# EAGLE board RFBoardLayoutGen0_v02.4 (EAGLE 7.5.0)
AUTHOR: Kirchschlager Raimund
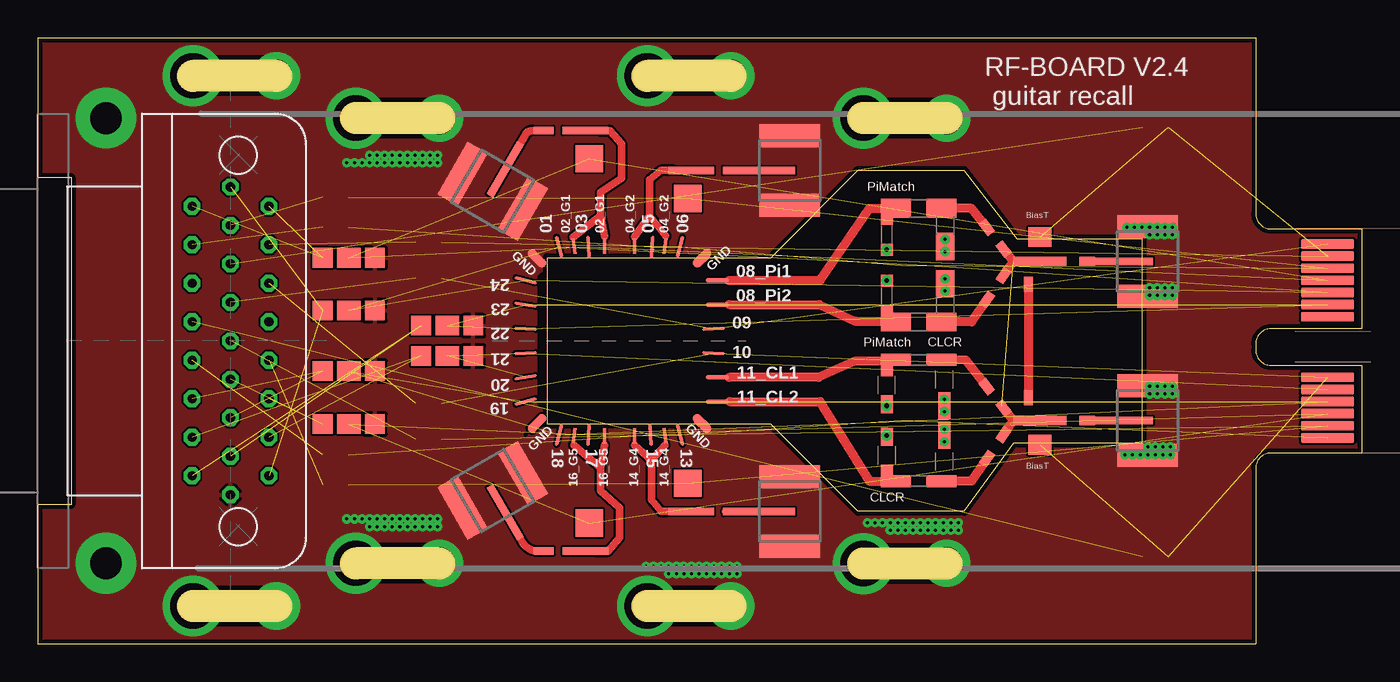
[diagram p0: board, top side]
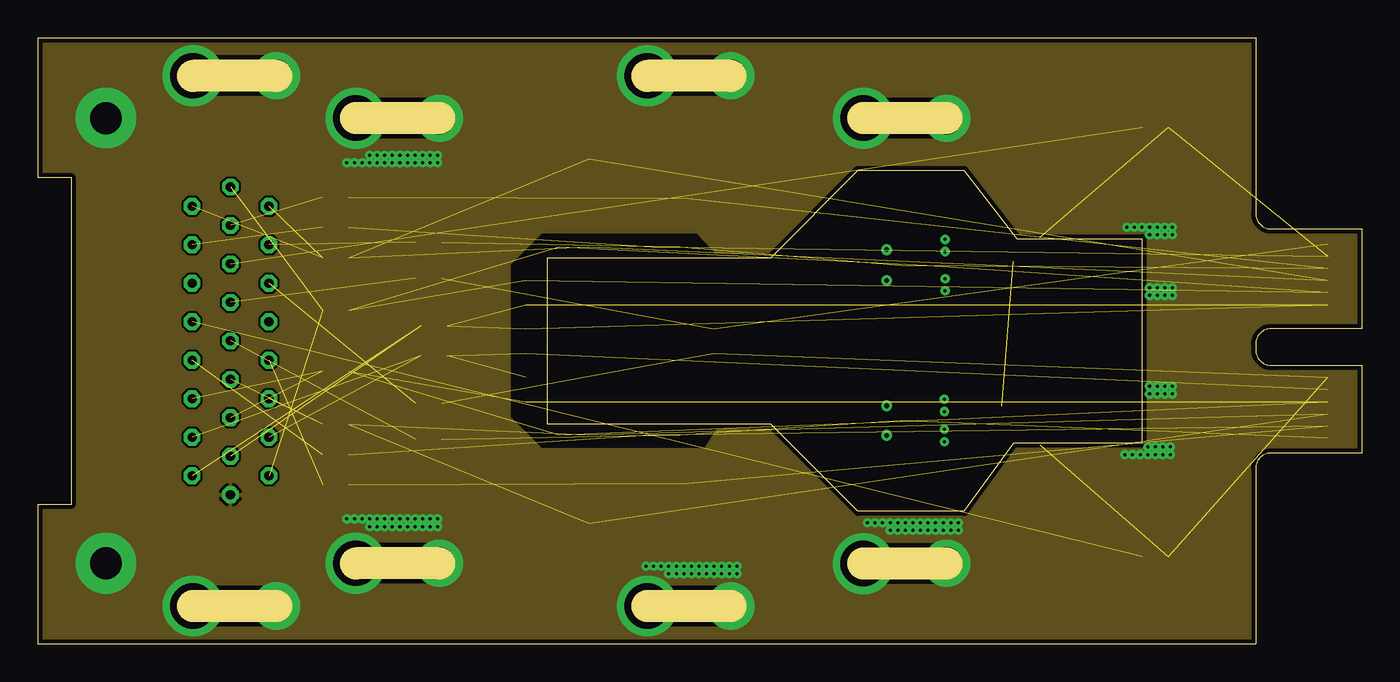
[diagram p1: board, inner layer Route2]
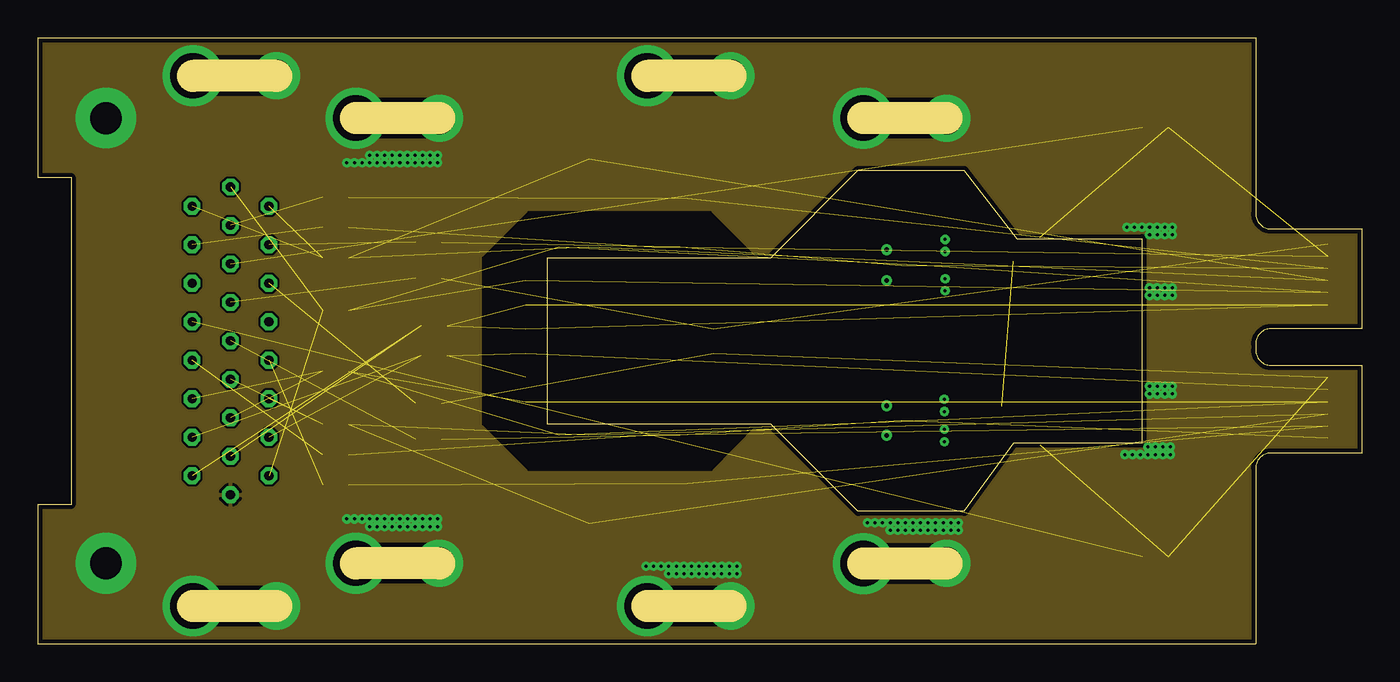
[diagram p2: board, inner layer Route15]
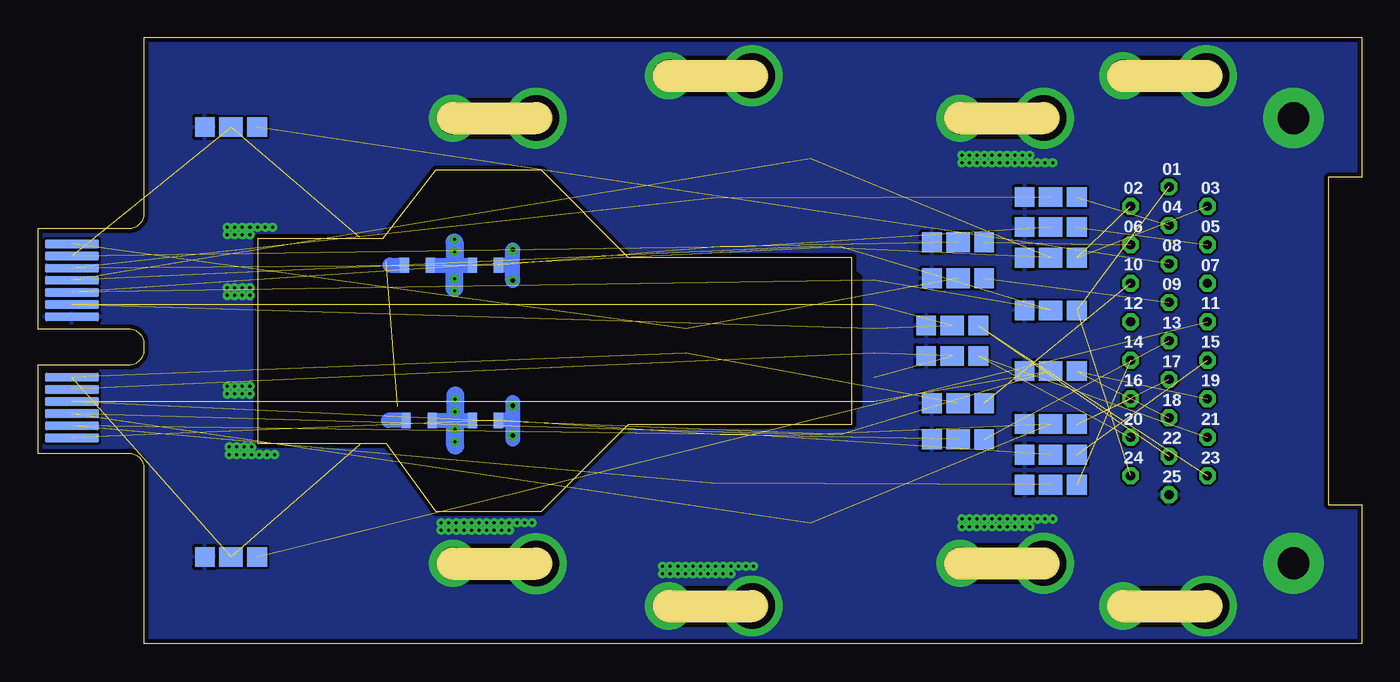
[diagram p3: board, bottom side, seen from below]

Size 87.4 x 40 mm. Coordinates in mm from the lower left corner, seen from the top.
Outline: 26.5,5.3 21,5.3
Outline: 26.5,34.7 21,34.7
Outline: 26.5,5.32 21,5.32
Outline: 15.75,37.5 10.25,37.5
Outline: 15.75,2.5 10.25,2.5
Outline: 45.75,2.5 40.25,2.5
Outline: 45.75,37.5 40.25,37.5
Outline: 60,34.7 54.5,34.7
Outline: 60,5.3 54.5,5.3
Outline: 0,40 0,30.8 2.2,30.8 2.2,9.2 0,9.2 0,0 80.4,0 80.4,11.6 arc-90 81.4,12.6 87.4,12.6 87.4,18.4 81.4,18.4 arc-90 80.4,19.4 80.4,19.8 arc-90 81.4,20.8 87.4,20.8 87.4,27.4 81.4,27.4 arc-90 80.4,28.4 80.4,40 0,40
Outline: 33.65,25.5 48.4,25.5 54.15,31.25 61.15,31.25 64.65,26.75 72.9,26.75 72.9,13.25 64.4,13.25 61.15,8.75 54.15,8.75 48.4,14.5 33.65,14.5 33.65,25.5
Copper layers (1+2*15+16): Top 0.035mm / dielectric 0.38mm / Route2 0.035mm / dielectric 0.71mm / Route15 0.035mm / dielectric 0.38mm / Bottom 0.035mm
Design rules "PCB-POOL HighSpec_ML4+ *": minimum track width 0.125mm, minimum drill 0.2mm, track to track 0.125mm, track to pad 0.125mm, pad to pad 0.125mm, via to via 0.125mm, smd to smd 0.125mm, copper to edge 0.3mm, drill to drill 0.2mm, minimum pad ring 10mil, minimum via ring 8mil, stop-mask expansion 0.075mm, vias tented up to drill 0.2mm, thermal gap 0.2mm
Net classes: 0 GND: clearance 0.15 mm; 1 RF: clearance 1 mm

## Footprints (pad centres in the part's own frame; a part is rotated, then mirrored left to right if it is on the bottom)
BIAS_TEE_DOWN_0603 = smd 1.3 x 0.5: HF 3.25,0 | smd 1.8 x 1.8: LF 0.25,1.85 | smd 3 x 0.5: OUT 0.5,0
BIAS_TEE_UP_0603 = smd 1.3 x 0.5: HF 3.25,0 | smd 1.8 x 1.8: LF 0.25,-1.85 | smd 3 x 0.5: OUT 0.5,0
24DC+4RF/400MU-PADS/10.0X10.0_V1.5 = smd 0 x 0: BASE 0,0 | smd 1.5 x 0.6 rotated 315: P$1 -5.45,5.45; P$6 5.45,-5.45 | smd 1.5 x 0.6 rotated 45: P$3 5.45,5.45; P$7 -5.45,-5.45 | smd 1.5 x 0.2 rotated 93: P$4 2.05,-6.2; P$40 -2.05,6.2 | smd 0 x 0 rotated 45: P$5 -6.2,-6.2 | smd 1.5 x 0.2 rotated 345: P$26 -6.2,4 | smd 1.5 x 0.2 rotated 351: P$27 -6.2,2.4 | smd 1.5 x 0.2 rotated 357: P$28 -6.2,0.8; P$35 6.2,-0.8 | smd 1.5 x 0.2 rotated 3: P$29 -6.2,-0.8; P$34 6.2,0.8 | smd 1.5 x 0.2 rotated 9: P$30 -6.2,-2.4 | smd 1.5 x 0.2 rotated 15: P$31 -6.2,-4 | smd 1.5 x 0.3: P$32 6.45,4; P$33 6.45,2.4; P$36 6.45,-2.4; P$37 6.45,-4 | smd 1.5 x 0.2 rotated 105: P$38 -4,6.2; P$49 4,-6.2 | smd 1.5 x 0.2 rotated 87: P$42 2.15,6.2; P$45 -2.05,-6.2 | smd 1.5 x 0.2 rotated 75: P$43 4,6.2; P$44 -4,-6.2 | smd 1 x 0.2 rotated 97: RF$02_G11 -3,6.25; RF$14_G41 3,-6.25 | smd 0.2 x 1: RF$02_G12 -1,6.25; RF$04_G21 1,6.25; RF$14_G42 1,-6.25; RF$16_G51 -1,-6.25 | smd 1 x 0.2 rotated 83: RF$04_G22 3,6.25; RF$16_G52 -3,-6.25
25_SOCKET_M83513/13-D = drill 0.6 octagon: 01 10.16,0; 02 8.89,2.54; 03 6.35,2.54; 04 3.81,2.54; 05 2.54,0; 06 1.27,2.54; 07 0,0; 08 -1.27,2.54; 09 -2.54,0; 10 -3.81,2.54; 11 -6.35,2.54; 12 -8.89,2.54; 13 -10.16,0; 14 8.89,-2.54; 15 7.62,0; 16 6.35,-2.54; 17 5.08,0; 18 3.81,-2.54; 19 1.27,-2.54; 20 -1.27,-2.54; 21 -3.81,-2.54; 22 -5.08,0; 23 -6.35,-2.54; 24 -7.62,0; 25 -8.89,-2.54
MEC8-113-02-L-D-RA1 = smd 0.6 x 3.5: 1 6.4,0.15; 3 5.6,0.15; 5 4.8,0.15; 7 4,0.15; 9 3.2,0.15; 11 2.4,0.15; 13 -1.6,0.15; 15 -2.4,0.15; 17 -3.2,0.15; 19 -4,0.15; 21 -4.8,0.15; 23 -5.6,0.15; 25 -6.4,0.15 | smd 0.6 x 3.5 bottom: 2 6.4,0.15; 4 5.6,0.15; 6 4.8,0.15; 8 4,0.15; 10 3.2,0.15; 12 2.4,0.15; 14 -1.6,0.15; 16 -2.4,0.15; 18 -3.2,0.15; 20 -4,0.15; 22 -4.8,0.15; 24 -5.6,0.15; 26 -6.4,0.15
LP-FILTER/1_STAGE/OS/0603_TOP_V1_01 = smd 1.3 x 1.3: $1 -1.6,0.01; GND@1 1.85,0.01 | smd 1.55 x 1.3: $2 0.125,0.01
PI_MATCH_V01_UP = smd 2 x 1.25: $1 0,0; $3 3,0 | smd 0.8 x 1.4: $2 -0.6,0.375 | smd 1.2 x 1.8: $4 3.25,2.525 | smd 0.8 x 0.8: GND@1 -0.6,2.725
CLCR_V01_DOWN = smd 2 x 0.8: $1 0,0; $3 3,0 | smd 0.8 x 1.4: $2 -0.6,-0.375 | smd 0.8 x 1.2: GND@1 -0.6,-2.925 | smd 0.8 x 1.8: GND@2 3.2,-3.025
LP-FILTER/1_STAGE/OS/0603_BOTTOM_V1_01 = smd 1.3 x 1.3 bottom: $1 -1.6,0.01; GND@1 1.85,0.01 | smd 1.55 x 1.3 bottom: $2 0.125,0.01
SMP_STRAIGHT_MINI_WIDE_V1_01 = smd 0.5 x 4: 1 0,1.653 | smd 1.524 x 4: GND -2.292,0; GND@1 2.292,0
BIAS_TEE_UP_V01 = smd 1.5 x 1.3: P$1 0,-0.95 | smd 3.5 x 0.6: P$2 0,0.65
BIAS_TEE_DOWN_V01 = smd 1.5 x 1.3: P$1 0,0.95 | smd 3.5 x 0.6: P$2 0,-0.65
SMD1-0,6 = smd 1 x 0.6: 1 0,0
PI_MATCH_V01_DOWN = smd 2 x 1.25: $1 0,0; $3 3,0 | smd 0.8 x 1.4: $2 -0.6,-0.375 | smd 1.2 x 1.8: $4 3.25,-2.525 | smd 0.8 x 0.8: GND@1 -0.6,-2.725
CLCR_V01_UP = smd 2 x 0.8: $1 0,0; $3 3,0 | smd 0.8 x 1.4: $2 -0.6,0.375 | smd 0.8 x 1.2: GND@1 -0.6,2.925 | smd 0.8 x 1.8: GND@2 3.2,3.025
SMP_STRAIGHT_MINI_WIDE = smd 0.5 x 4: 1 0,1.653 | smd 1.524 x 4: 2@1 -2.292,0; 2@2 2.292,0

## Placement (x,y rotation side)
B$1  [BIAS_TEE_DOWN_0603]  36.65,33.88 180 top
B$2  [BIAS_TEE_UP_0603]  42.65,31.25 0 top
B$4  [BIAS_TEE_DOWN_0603]  42.65,8.75 0 top
B$5  [BIAS_TEE_UP_0603]  36.65,6.12 180 top
E$1  [24DC+4RF/400MU-PADS/10.0X10.0_V1.5]  38.4,20 0 top
E$2  [25_SOCKET_M83513/13-D]  12.71,20 90 top
E$3  [MEC8-113-02-L-D-RA1]  85,20 270 top
E$4  [LP-FILTER/1_STAGE/OS/0603_TOP_V1_01]  20.4,29.5 180 bottom
E$5  [LP-FILTER/1_STAGE/OS/0603_TOP_V1_01]  20.4,12.5 180 bottom
E$6  [LP-FILTER/1_STAGE/OS/0603_TOP_V1_01]  20.4,25.5 180 bottom
E$7  [LP-FILTER/1_STAGE/OS/0603_TOP_V1_01]  20.4,18 0 top
E$8  [LP-FILTER/1_STAGE/OS/0603_TOP_V1_01]  20.4,22 0 top
E$9  [PI_MATCH_V01_UP]  56.65,21.25 0 top
E$10  [CLCR_V01_DOWN]  56.65,18.75 0 top
E$11  [LP-FILTER/1_STAGE/OS/0603_TOP_V1_01]  26.9,21 0 top
E$12  [LP-FILTER/1_STAGE/OS/0603_TOP_V1_01]  20.4,14.5 0 top
E$13  [LP-FILTER/1_STAGE/OS/0603_TOP_V1_01]  74.53,5.75 180 bottom
E$14  [LP-FILTER/1_STAGE/OS/0603_TOP_V1_01]  74.53,34.12 180 bottom
E$15  [LP-FILTER/1_STAGE/OS/0603_TOP_V1_01]  26.9,19 0 top
E$16  [LP-FILTER/1_STAGE/OS/0603_BOTTOM_V1_01]  20.4,22 0 top
E$17  [LP-FILTER/1_STAGE/OS/0603_BOTTOM_V1_01]  20.4,14.5 0 top
E$18  [LP-FILTER/1_STAGE/OS/0603_BOTTOM_V1_01]  20.4,10.5 0 top
E$19  [LP-FILTER/1_STAGE/OS/0603_BOTTOM_V1_01]  26.9,21 0 top
E$20  [LP-FILTER/1_STAGE/OS/0603_BOTTOM_V1_01]  20.4,27.5 0 top
E$21  [LP-FILTER/1_STAGE/OS/0603_BOTTOM_V1_01]  20.4,18 0 top
E$22  [LP-FILTER/1_STAGE/OS/0603_BOTTOM_V1_01]  26.9,19 0 top
E$23  [LP-FILTER/1_STAGE/OS/0603_BOTTOM_V1_01]  20.4,25.5 180 bottom
E$24  [LP-FILTER/1_STAGE/OS/0603_BOTTOM_V1_01]  26.52,26.5 0 top
E$25  [LP-FILTER/1_STAGE/OS/0603_BOTTOM_V1_01]  26.52,24.12 0 top
E$26  [SMP_STRAIGHT_MINI_WIDE_V1_01]  73.28,25.25 90 top
E$27  [LP-FILTER/1_STAGE/OS/0603_BOTTOM_V1_01]  26.52,13.5 0 top
E$28  [LP-FILTER/1_STAGE/OS/0603_BOTTOM_V1_01]  26.52,15.88 0 top
E$29  [BIAS_TEE_UP_V01]  66.15,14.1 0 top
E$30  [BIAS_TEE_DOWN_V01]  66.15,25.9 0 top
E$31  [SMD1-0,6]  65.4,23.75 90 top
E$32  [PI_MATCH_V01_DOWN]  56.65,28.75 0 top
E$33  [SMP_STRAIGHT_MINI_WIDE_V1_01]  73.28,14.75 90 top
E$34  [SMD1-0,6]  57,25 90 bottom
E$35  [SMD1-0,6]  65.4,16.25 90 top
E$36  [SMD1-0,6]  58.7,25 90 bottom
E$37  [CLCR_V01_UP]  56.65,10.75 0 top
E$38  [SMD1-0,6]  62.65,27.48 128 top
E$39  [SMD1-0,6]  63.75,26.07 128 top
E$40  [SMD1-0,6]  62.65,16.98 128 top
E$41  [SMD1-0,6]  63.75,15.57 128 top
E$42  [SMD1-0,6]  63.75,24.3 235.5 top
E$43  [SMD1-0,6]  62.67,22.74 235.5 top
E$44  [SMD1-0,6]  63.75,13.8 235.5 top
E$45  [SMD1-0,6]  62.67,12.24 235.5 top
E$46  [SMD1-0,6]  57,14.75 90 bottom
E$47  [SMD1-0,6]  58.7,14.75 90 bottom
E$48  [SMD1-0,6]  69.28,14.75 0 top
E$49  [SMD1-0,6]  61.5,25 90 bottom
E$50  [SMD1-0,6]  63.2,25 90 bottom
E$51  [SMD1-0,6]  61.38,14.75 90 bottom
E$52  [SMD1-0,6]  63.08,14.75 90 bottom
E$54  [SMD1-0,6]  69.28,25.25 0 top
S$2  MC-921SMALL  [SMP_STRAIGHT_MINI_WIDE]  30.02,10.12 210 top
S$3  MC-921SMALL  [SMP_STRAIGHT_MINI_WIDE]  49.65,8.75 90 top
S$6  MC-921SMALL  [SMP_STRAIGHT_MINI_WIDE]  49.65,31.25 90 top
S$7  MC-921SMALL  [SMP_STRAIGHT_MINI_WIDE]  30.02,29.88 330 top

## Library data of the parts
B$1 B$2 B$4 B$5 E$29 E$30 = Bias tee
E$1 = SampleArea
E$2 = Glenair
E$3 = MEC8-130-02-X-D-RA1
E$4-E$8 E$11-E$25 E$27 E$28 = LPFilter
E$9 E$10 E$32 E$37 = MatchCircuit
E$26 E$33 S$2 S$3 S$6 S$7 = RF Connectors
E$31 E$34-E$36 E$38-E$52 E$54 = PADS

## Nets
D$2: B$1.LF E$3.19 E$6.$2
D$4: B$2.LF E$3.21 E$4.$2
GND: E$1.P$1 E$1.P$3 E$1.P$6 E$2.13 E$3.14 E$4.GND@1 E$5.GND@1 E$6.GND@1 E$7.GND@1 E$8.GND@1 E$11.GND@1 E$12.GND@1 E$13.GND@1 E$14.GND@1 E$15.GND@1 E$16.GND@1 E$17.GND@1 E$18.GND@1 E$19.GND@1 E$20.GND@1 E$21.GND@1 E$22.GND@1 E$23.GND@1 E$24.GND@1 E$25.GND@1 E$26.GND E$26.GND@1 E$27.GND@1 E$28.GND@1 E$33.GND E$33.GND@1 S$2.2@1 S$2.2@2 S$3.2@1 S$3.2@2 S$6.2@1 S$6.2@2 S$7.2@1 S$7.2@2
S$1: E$1.P$30 E$22.$2
S$2: E$1.P$44 E$3.8 E$21.$2 E$47.1
S$55: E$1.P$49 E$3.2 E$27.$2 E$46.1
S$67: E$2.24 E$11.$1
S$68: E$1.P$29 E$3.9 E$15.$2
S$76: E$2.11 E$15.$1
S$79: E$1.P$27 E$3.16 E$19.$2
S$80: E$2.12 E$19.$1
S$81: E$3.10
S$83: E$2.23 E$22.$1
S$84: E$1.P$26 E$3.17 E$8.$2
S$85: E$2.25 E$8.$1
S$86: E$1.P$38 E$3.18 E$16.$2 E$36.1
S$88: E$2.01 E$16.$1
S$89: E$1.P$31 E$3.7 E$7.$2
S$90: E$2.10 E$7.$1
S$95: E$2.22 E$21.$1
S$144: E$2.14 E$6.$1
S$145: E$1.P$40 E$3.20 E$23.$2
S$146: E$2.02 E$23.$1
S$147: B$5.LF E$3.6 E$17.$2
S$149: E$2.15 E$4.$1
S$150: E$1.P$42 E$3.24 E$20.$2
S$151: E$2.03 E$20.$1
S$152: E$1.P$45 E$3.5 E$12.$2
S$154: E$2.09 E$12.$1
S$155: B$4.LF E$3.4 E$18.$2
S$156: E$2.21 E$17.$1
S$157: E$1.P$4 E$3.3 E$5.$2
S$158: E$2.08 E$5.$1
S$160: E$2.20 E$18.$1
S$162: E$2.16 E$24.$1
S$168: E$2.17 E$14.$1
S$169: E$1.P$34 E$3.26 E$25.$2
S$170: E$2.05 E$25.$1
S$171: E$2.07 E$27.$1
S$174: E$1.P$28 E$3.15 E$11.$2
S$175: E$2.06 E$13.$1
S$177: E$1.P$35 E$3.11 E$28.$2
S$178: E$2.18 E$28.$1
S$183: E$3.12 E$13.$2 E$29.P$1
S$190: E$3.23 E$14.$2 E$30.P$1
S$199: E$30.P$2
S$211: E$1.P$43 E$3.22 E$24.$2 E$34.1

## Tracks (layer width: path | path; a pad name or v marks a point on that pad's centre or on a via)
D$2  (2 unrouted)
D$4  (2 unrouted)
GND  (via drill 0.2, 2.1, 2.1 pad 4, 3, 3 pad 0.25)
  other vias: 40.25,37.5 45.75,37.5 4.5,34.7 21,34.7 26.5,34.7 10.25,37.5 15.75,37.5 54.5,5.3 40.25,2.5 45.75,2.5 60,5.32 54.5,34.7 60,34.7 4.5,5.32 21,5.32 26.5,5.32 10.25,2.5 15.75,2.5 20.4,31.75 20.9,31.75 21.4,31.75 21.9,31.75 22.4,31.75 22.9,31.75 23.4,31.75 23.9,31.75 24.4,31.75 24.9,31.75 25.4,31.75 25.9,31.75 26.4,31.75 26.4,32.25 25.9,32.25 25.4,32.25 24.9,32.25 24.4,32.25 23.9,32.25 23.4,32.25 22.9,32.25 22.4,32.25 21.9,32.25 26.4,8.25 25.9,8.25 25.4,8.25 24.9,8.25 24.4,8.25 23.9,8.25 23.4,8.25 22.9,8.25 22.4,8.25 21.9,8.25 21.4,8.25 20.9,8.25 20.4,8.25 21.9,7.75 22.4,7.75 22.9,7.75 23.4,7.75 23.9,7.75 24.4,7.75 24.9,7.75 25.4,7.75 25.9,7.75 26.4,7.75 46.15,5.12 45.65,5.12 45.15,5.12 44.65,5.12 44.15,5.12 43.65,5.12 43.15,5.12 42.65,5.12 42.15,5.12 41.65,5.12 41.15,5.12 40.65,5.12 40.15,5.12 41.65,4.62 42.15,4.62 42.65,4.62 43.15,4.62 43.65,4.62 44.15,4.62 44.65,4.62 45.15,4.62 45.65,4.62 46.15,4.62 60.77,8 60.27,8 59.77,8 59.27,8 58.77,8 58.27,8 57.77,8 57.27,8 56.77,8 56.27,8 55.77,8 55.27,8 54.77,8 56.27,7.5 56.77,7.5 57.27,7.5 57.77,7.5 58.27,7.5 58.77,7.5 59.27,7.5 59.77,7.5 60.27,7.5 60.77,7.5 74.78,13 74.28,13 73.78,13 73.28,13 74.9,16.5 74.4,16.5 73.9,16.5 73.4,16.5 74.9,17 74.4,17 73.9,17 73.4,17 74.9,23.5 74.4,23.5 73.9,23.5 73.4,23.5 74.9,27 74.4,27 73.9,27 73.4,27 74.9,27.5 74.4,27.5 73.9,27.5 73.4,27.5 72.9,27.5 72.4,27.5 71.9,27.5 74.9,23 74.4,23 73.9,23 73.4,23 74.78,12.5 74.28,12.5 73.78,12.5 73.28,12.5 72.78,12.5 72.28,12.5 71.78,12.5
  pour Top (rank 6): -4.85,43.6 92.1,43.7 92.1,-4.7 -4.85,-4.8
  pour Route2 (rank 6): -7.5,45.1 92.6,45.6 92.6,-5.15 -7.5,-5.65
  pour Route15 (rank 6): -11.25,48.5 94.9,48.5 94.9,-11.4 -11.25,-11.4
  pour Bottom (rank 6): -16.65,53.3 97.15,53.2 97.15,-15.85 -16.65,-15.75
N$3
  Top 0.5: 37.02,33.88 37.77,33.88 38.52,33 38.52,30.75 37.15,29.8 37.15,28.38
S$1  (1 unrouted)
S$2  (3 unrouted)
S$12  (via drill 0.2)
  other vias: 59.9,25.89
S$17
  cutout Route15: 44.46,11.51 42.9,11.5 32.4,11.5 29.4,14.5 29.4,19.5 29.4,20.5 29.4,25.5 32.4,28.5 44.4,28.5 47.4,25.5 47.4,20.5 47.4,19.5 47.4,14.5
S$55  (3 unrouted)
S$67  (1 unrouted)
S$68  (2 unrouted)
S$76  (1 unrouted)
S$79  (2 unrouted)
S$80  (1 unrouted)
S$82
  cutout Route15: 43.96,13.01 33.3,13.01 31.3,14.99 31.3,25.02 33.3,27 43.5,27 45.43,24.94 45.43,15.29
  cutout Bottom: 42.46,14.76 34.55,14.76 33.05,15.74 33.05,24.27 34.3,25.25 42.5,25.25 43.89,25.24 43.89,14.75
  cutout Top: 42.46,14.76 34.55,14.76 33.05,15.74 33.05,24.27 34.3,25.25 42.5,25.25 43.89,25.24 43.89,14.75
S$83  (1 unrouted)
S$84  (2 unrouted)
S$85  (1 unrouted)
S$86  (3 unrouted)
S$88  (1 unrouted)
S$89  (2 unrouted)
S$90  (1 unrouted)
S$91
  Top 0.5: 45.65,31.25 49.65,31.25
S$95  (1 unrouted)
S$144  (1 unrouted)
S$145  (2 unrouted)
S$146  (1 unrouted)
S$147  (2 unrouted)
S$149  (1 unrouted)
S$150  (2 unrouted)
S$151  (1 unrouted)
S$152  (2 unrouted)
S$154  (1 unrouted)
S$155  (2 unrouted)
S$156  (1 unrouted)
S$157  (2 unrouted)
S$158  (1 unrouted)
S$159
  Top 0.5: 33.52,33.88 32.77,33.88
S$160  (1 unrouted)
S$161
  Bottom 1.2: 59.9,23.5 59.9,24.9
S$162  (1 unrouted)
S$163  (via drill 0.2)
  other vias: 59.85,15.34
S$164
  Bottom 1.2: 59.85,16.4 59.85,14.98
S$165
  cutout Route2: 43.96,13.01 33.3,13.01 31.3,14.99 31.3,25.02 33.3,27 43.5,27 45.43,24.94 45.43,15.29
S$166  (via drill 0.2)
  other vias: 59.9,24.11
S$167
  Bottom 1: 56.05,24 56.05,26
S$168  (1 unrouted)
S$169  (2 unrouted)
S$170  (1 unrouted)
S$171  (1 unrouted)
S$172
  Bottom 1: 56.1,25 56.8,25
S$173
  Bottom 1: 61.25,25 58.9,25
S$174  (2 unrouted)
S$175  (1 unrouted)
S$176
  Top 0.6: 45.65,24 51.65,24 54.9,28.75 56.4,28.75
S$177  (2 unrouted)
S$178  (1 unrouted)
S$180
  Top 0.6: 45.65,22.4 51.6,22.4 53.95,21.3 56.6,21.3
S$181
  cutout Top: 43.9,25.5 48.4,25.5 54.1,31.2 61.2,31.2 64.6,26.8 72.9,26.8 72.9,13.3 64.4,13.3 61.2,8.8 54.2,8.8 54.1,8.8 48.4,14.5 43.9,14.5
  cutout Route2: 43.9,25.5 48.4,25.5 54.1,31.2 61.2,31.2 64.6,26.8 72.9,26.8 72.9,13.3 64.4,13.3 61.2,8.8 54.2,8.8 54.1,8.8 48.4,14.5 43.9,14.5
  cutout Route15: 43.9,25.5 48.4,25.5 54.1,31.2 61.2,31.2 64.6,26.8 72.9,26.8 72.9,13.3 64.4,13.3 61.2,8.8 54.2,8.8 54.1,8.8 48.4,14.5 43.9,14.5
  cutout Bottom: 43.9,25.5 48.4,25.5 54.1,31.2 61.2,31.2 64.6,26.8 72.9,26.8 72.9,13.3 64.4,13.3 61.2,8.8 54.2,8.8 54.1,8.8 48.4,14.5 43.9,14.5
S$183  (2 unrouted)
S$184
  Top 0.5: 32.65,33.88 arc58 32.22,33.66 31.4,32.25
S$185
  Top 0.5: 35.35,26.85 37.15,28.25 37.4,26.9
S$186
  Top 0.5: 40.4,28.25 40.4,30.62 41.15,31.25 41.9,31.25 42.02,31.25 44.4,31.25 | 40.4,28.25 39.4,26.88 | 40.4,28.25 41.45,26.93
S$187
  Top 0.6: 51.65,16 54.9,10.75 56.9,10.75
S$188
  Top 0.6: 56.65,18.65 53.9,18.65 51.55,17.6 45.65,17.6
S$189
  Top 0.6: 66.65,14.75 64.4,14.75
S$190  (2 unrouted)
S$191  (via drill 0.3)
  other vias: 56.05,26.02
S$192
  Bottom 1: 63.27,14.75 64.28,14.75
S$193
  Bottom 1: 56.05,15.95 56.05,13.53
S$194
  Bottom 1.2: 59.9,26.5 59.9,25.2
S$195
  Top 0.6: 65.4,23.75 65.4,16.25
S$196  (via drill 0.3)
  other vias: 56.05,15.72
S$197
  Top 0.6: 59.4,28.75 61.65,28.75 62.75,27.35
S$198
  Top 0.6: 59.65,21.25 61.65,21.25 62.75,22.85
S$200
  Top 0.6: 59.4,18.75 61.27,18.74 62.75,16.85
S$201  (1 unrouted)
  Top 0.6: 65.9,14.75 64.4,14.75 63.65,15.7 | 64.4,25.25 63.65,26.2
S$202
  Top 0.6: 63.68,24.2 64.4,25.25
S$203
  Top 0.6: 61.65,10.75 59.65,10.75
S$204
  Top 0.6: 61.65,10.75 62.75,12.35
S$205
  Top 0.6: 63.68,13.7 64.4,14.75
S$206
  Top 0.6: 45.67,16 51.65,16
S$207
  Bottom 1: 61.12,14.75 58.9,14.75
S$208  (via drill 0.2)
  other vias: 59.9,26.7
S$209
  Bottom 1.2: 59.85,13.1 59.85,14.6
S$210  (via drill 0.3)
  other vias: 56.05,24
S$211  (3 unrouted)
S$212  (via drill 0.2)
  other vias: 59.9,23.31
S$213  (via drill 0.3)
  other vias: 56.05,13.77
S$214  (via drill 0.2)
  other vias: 59.85,13.34
S$215  (via drill 0.2)
  other vias: 59.84,16.14
S$216  (via drill 0.2)
  other vias: 59.85,14.17
S$217
  Top 0.5: 45.4,8.75 49.65,8.75
S$218
  Bottom 1: 56.1,14.75 56.8,14.75
S$219
  Top 0.5: 40.52,12.12 40.52,9.5 41.15,8.75 41.9,8.75 42.65,8.75 44.4,8.75 | 40.52,12.12 41.4,13.12 | 40.52,12.12 39.4,13.12
S$220
  Bottom 1: 64.15,25 63.52,25
S$221
  Top 0.5: 33.02,6.12 arc-61 31.98,6.73 31.45,7.68
S$222
  Top 0.5: 37.15,11.62 37.15,10.12 38.4,9 38.4,7 37.65,6.12 37.52,6.12 36.77,6.12 34.9,6.12 | 37.15,11.62 37.4,13.12 | 37.15,11.62 35.4,13.12
S$223
  Top 0.5: 30.02,10.12 31.72,7.18
S$224
  Top 0.5: 31.77,32.88 29.97,29.77

## Text on the board
tPlace: 4 | 2 | 22 | 24 | 19 | 21 | 17 | 8 | 15 | RF-BOARD V2.4 / guitar recall | 11
bPlace: 5 | 3 | 23 | VB2_Pi / 1 | 20 | 18 / VB2_CL | 16 | 6 / VB1_Pi | 9 | 14 | 01 | 03 | 02 | 04 | 05 | 06 | 08 | 07 | 10 | 09 | 11 | 12 | 13 | 15 | 14 | 17 | 19 | 16 | 18 | 21 | 20 | 22 | 23 | 24 | 25 | 10 | VB1_CL / 13